# Altium PCB 3KW-139_V1.0PCB.PcbDoc (part 2 of 3)
Units mm, origin at the board's own origin, x right, y up, seen from the top; angles counter-clockwise.
Board outline 181.22 x 106.87 mm, 2 copper layers (Top Layer, Bottom Layer); 320 components, 0 nets, 807 pads, 870 vias.
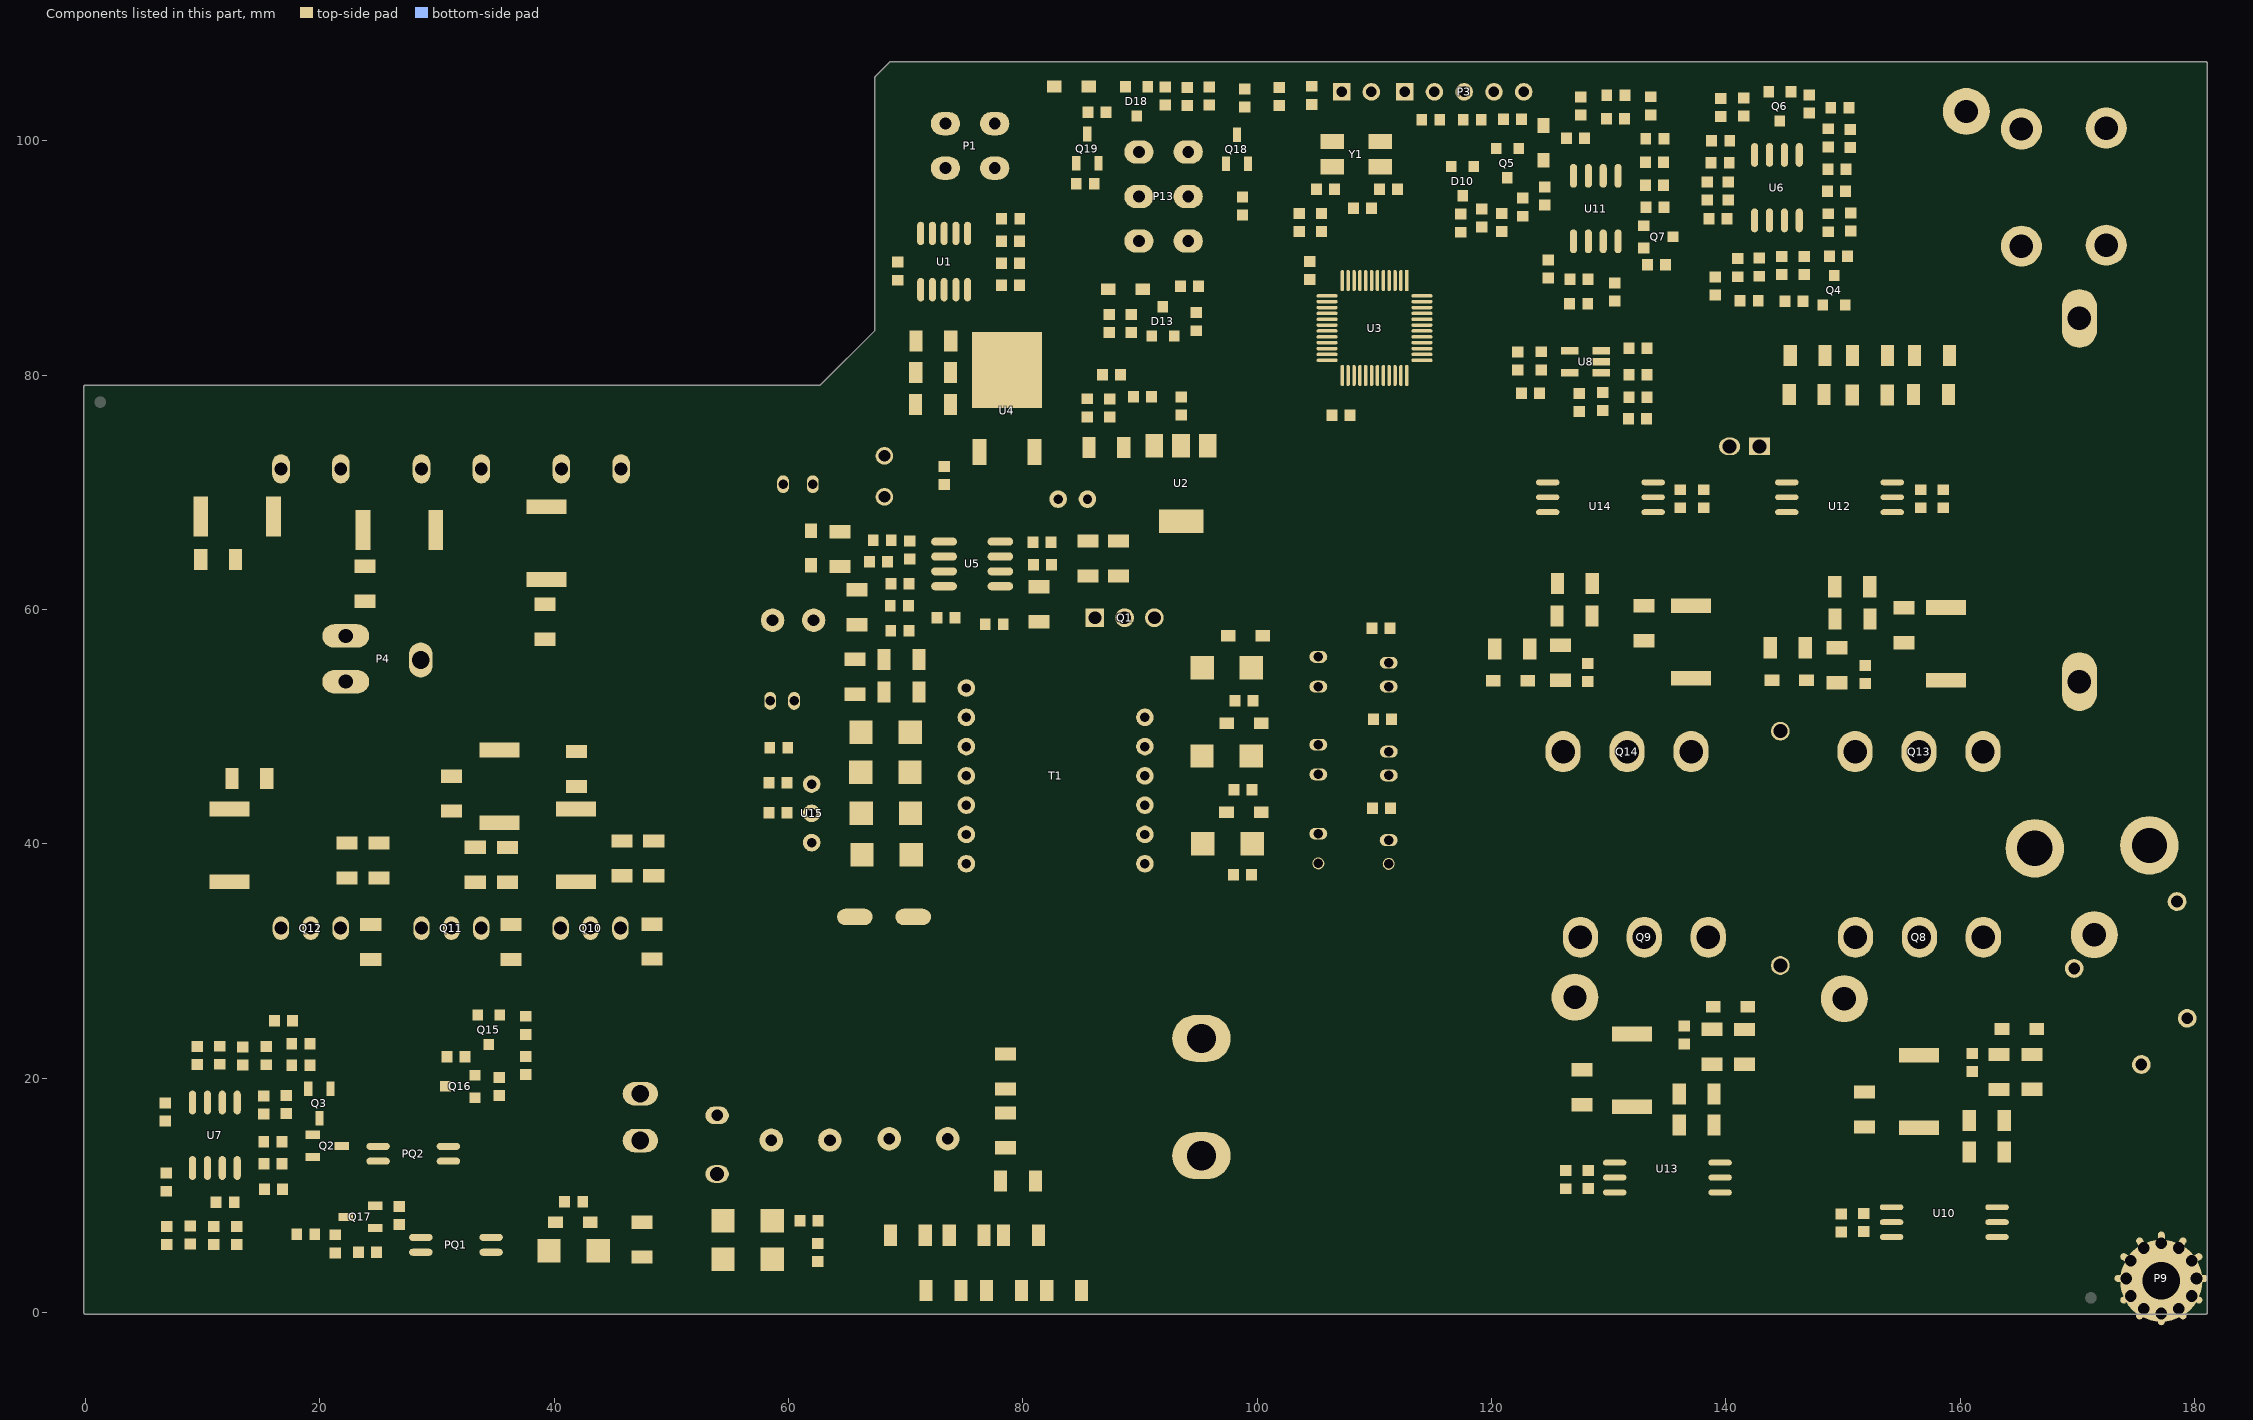
[diagram p2: the components of this part, seen from the top]

## Via types
v1: diameter 0.8, hole 0.5, Top Layer to Bottom Layer, 773 vias
v2: diameter 0.6, hole 0.4, Top Layer to Bottom Layer, 86 vias
v3: diameter 0.6, hole 0.3, Top Layer to Bottom Layer, 6 vias
v4: diameter 1.2, hole 0.8, Top Layer to Bottom Layer, 2 vias
v5: diameter 0.7/0.7 (per signal layer), hole 0.5, Top Layer to Bottom Layer, 1 vias
v6: diameter 0.7/0.8 (per signal layer), hole 0.5, Top Layer to Bottom Layer, 1 vias
v7: diameter 0.7, hole 0.4, Top Layer to Bottom Layer, 1 vias

## Nets (pads, with @x,y where several pads share a name; then routed paths per layer and width w, separated by ;. In a path a pad name is that pad's centre, name@x,y a point inside that pad or via, vN(x,y) a via of type N, cw(c..) or ccw(c..) an arc to the next point about the centre after c; other vN are vias at no path point) (continued)
copper on no net: | length 6732.2
  Top Layer w0.254: 72.294,87.297 72.36,87.363 72.36,88.686 74.073,90.399 75.806,90.399 77.069,91.662 77.069,92.361 77.946,93.238 78.204,93.238 ; 110.882,75.42 110.898,75.404 v2(110.898,74.05)
  Top Layer w0.3: v1@2.475,19.44 1.401,20.514 1.401,72.364 7.32,78.283 66.463,78.283 66.391,78.211 v1(66.303,78.211) ; v1@3.652,6.697 3.652,19.879 2.151,21.38 2.151,71.971 7.464,77.283 64.718,77.283 65.166,76.835 67.064,76.835 v1(67.32,77.092) 67.458,77.092 v1@67.44,77.073 ; 7.026,26.155 7.033,26.162 ; 15.282,10.54 15.597,10.855 15.597,11.152 16.482,12.037 16.482,12.384 16.797,12.699 ; 19.032,19.1 19.032,18.825 20.032,17.825 20.777,17.825 21.314,17.288 21.314,15.7 20.672,15.059 20.672,14.316 19.872,13.516 19.872,13.479 19.672,13.279 19.397,13.279 19.232,13.279 ; 61.938,63.781 61.938,63.906 63.01,64.978 66.07,64.978 66.927,64.121 66.927,64.096 ; 67.24,65.9 67.24,65.627 68.467,64.4 68.467,64.102 68.467,64.096 ; 68.738,58.204 68.738,58.229 69.049,58.54 69.049,58.778 69.921,59.651 69.921,59.996 70.236,60.311 ; v2@72.891,85.303 75.803,85.303 77.049,86.55 77.078,86.521 77.119,86.563 v2(83.857,86.563) ; 73.294,87.297 73.294,88.472 74.494,89.672 76.459,89.672 77.985,91.198 ; 74.294,87.297 74.294,88.411 74.804,88.922 77.567,88.922 ; 75.294,92.097 75.294,92.533 75.433,92.671 75.868,92.671 v2@76.164,92.967 ; 75.34,87.671 78.2,87.671 ; v2(76.083,92.244) 76.083,92.326 76.243,92.486 v2(76.243,93.065) ; 79.74,87.671 79.875,87.536 v2(81.962,87.536) ; 79.74,89.554 79.779,89.593 v2@80.42,89.593 ; 79.74,91.438 79.749,91.429 v2@81.587,91.429 ; 79.744,93.365 81.658,93.365 v2(81.665,93.372) ; 85.15,104.986 85.5,104.636 85.625,104.636 85.277,104.985 ; v2(85.466,88.737) 86.105,89.375 86.105,96.327 ; 85.497,79.693 85.553,79.693 ; 89.719,102.12 91.243,102.12 91.837,102.715 91.837,102.74 92.152,103.055 92.177,103.055 95.918,103.055 95.918,101.808 v2@95.912,101.802 ; 90.669,104.62 90.695,104.595 ; v2@90.726,103.641 90.726,104.563 90.695,104.595 ; 92.177,104.595 90.695,104.595 ; 93.237,87.576 93.38,87.718 93.38,88.23 94.381,89.231 95.861,89.231 v2(97.579,90.949) ; 95.923,104.59 95.918,104.595 95.922,104.599 v2(96.931,104.599) ; v2@97.637,91.007 98.754,92.124 98.754,93.675 98.729,93.675 98.414,93.36 ; v2@97.896,87.638 97.896,80.826 v2(97.898,80.826) ; v2(98.857,89.742) 98.857,89.743 98.87,89.73 98.87,84.047 100.144,82.774 105.971,82.774 ; v2(99.833,79.798) 101.308,81.274 105.971,81.274 ; v2@100.184,101.647 100.184,90.217 99.816,89.849 99.816,84.559 100.601,83.774 105.971,83.774 ; v2@100.327,78.189 101.9,79.761 107.271,79.761 ; v2@100.749,88.701 100.757,88.694 100.757,87.577 102.058,86.276 103.046,86.276 103.048,86.274 105.971,86.274 ; v2@100.757,85.432 101.415,84.774 105.971,84.774 ; v2(100.777,88.663) 100.777,89.863 101.043,90.128 101.043,100.849 101.911,101.717 101.911,103.025 ; v2(101.812,89.74) 101.839,89.767 101.839,100.306 104.648,103.115 ; v2@102.861,91.012 102.861,87.659 103.743,86.776 105.969,86.776 105.971,86.774 ; 103.602,92.271 102.936,92.271 102.619,92.588 102.619,99.63 104.671,101.682 113.928,101.682 114.049,101.803 ; 103.764,92.264 104.945,92.264 105.202,92.007 107.771,89.438 107.771,88.074 ; 103.764,93.804 103.852,93.717 105.507,93.717 ; 104.12,88.074 106.129,88.074 ; 104.416,103.137 104.648,103.369 ; 104.481,89.69 104.481,90.696 v2@104.492,90.707 ; 106.065,76.221 106.065,76.436 107.271,77.642 107.271,79.761 ; v2(106.129,88.919) 106.129,88.074 ; 106.395,97.784 106.609,97.57 ; 106.609,95.883 106.609,95.431 107.81,94.231 107.83,94.231 ; v1@107.164,62.723 107.782,63.342 107.782,73.355 107.92,73.492 107.92,76.38 108.121,76.581 ; v3(107.17,91.721) v3@107.17,91.786 ; 107.271,79.974 107.271,79.761 ; 107.271,88.074 106.129,88.074 ; 107.83,94.256 107.83,94.231 ; 108.211,94.231 107.83,94.231 ; v2(108.288,85.723) 108.307,85.742 v2(109.89,85.742) ; v2@108.292,85.89 108.271,85.911 108.271,88.074 108.271,90.685 v3@107.17,91.786 ; v2(108.488,97.875) v2(108.488,99.818) 104.855,99.818 104.445,99.408 104.445,96.507 104.729,96.223 104.754,96.223 105.069,95.908 105.069,95.883 105.192,95.761 105.192,94.032 105.507,93.717 ; v2(108.682,72.982) 108.74,73.039 108.74,75.226 109.271,75.757 109.271,79.974 ; 108.771,88.074 108.771,91.496 107.993,92.273 107.993,94.067 107.83,94.231 ; 108.791,97.784 110.495,97.784 ; 109.271,88.074 109.271,91.542 109.987,92.258 109.987,93.995 109.751,94.231 110.881,94.231 111.835,95.184 ; 109.771,74.473 109.771,79.974 ; 109.771,88.074 109.771,91.266 v2@113.758,95.253 ; v2@109.944,82.093 111.202,82.093 112.022,81.274 114.071,81.274 ; 110.271,79.974 110.271,76.031 110.882,75.42 ; v2@110.27,83.654 111.266,83.654 112.646,82.274 114.071,82.274 ; 110.495,99.937 111.013,99.937 112.299,98.651 112.299,96.196 111.984,95.881 111.984,95.856 ; v2@110.678,82.801 111.412,82.801 112.439,81.774 114.071,81.774 ; 110.771,79.974 110.771,76.918 111.798,75.891 111.798,70.37 v2(111.664,70.236) ; v2@110.988,84.705 112.919,82.774 114.071,82.774 ; 111.271,88.074 111.271,91.861 114.491,95.081 114.491,99.549 115.58,100.638 118.307,100.638 119.133,101.464 119.133,101.804 ; 111.771,79.974 111.771,78.007 112.794,76.984 120.076,76.984 ; 111.771,88.074 111.771,91.4 115.249,94.879 115.249,99.117 116.021,99.888 119.003,99.888 v2@119.443,100.328 ; 112.271,79.974 112.271,78.416 112.925,77.762 119.455,77.762 119.881,78.188 119.881,83.511 v2(122.486,86.116) v2@122.486,86.046 ; 114.071,83.274 115.305,83.274 118.133,80.446 v2(118.133,80.383) ; 114.071,83.774 115.773,83.774 119.03,80.516 v2@119.03,79.178 ; 114.071,84.774 115.889,84.774 119.065,81.598 v2(119.085,81.598) ; 114.071,85.774 117.803,85.774 ; 114.071,86.274 114.072,86.275 117.066,86.275 119.182,88.391 119.182,92.633 118.872,92.943 118.5,92.943 118.018,93.425 117.698,93.425 117.383,93.74 117.383,95.163 117.538,95.318 ; v2(114.268,88.889) 114.268,92.266 v2@114.974,92.972 ; v2(115.671,88.149) 115.671,90.637 117.383,92.348 117.383,92.2 ; 116.588,97.818 116.588,98.841 116.866,99.12 120.216,99.12 ; v2@116.618,87.36 116.618,90.091 v2(117.505,90.978) ; 117.849,85.775 122.656,90.582 122.656,93.568 121.114,93.568 120.878,93.803 121.054,93.979 121.054,96.52 121.066,96.52 121.366,96.82 121.366,96.845 ; 119.182,94.173 119.182,98.011 119.191,98.02 ; 120.077,76.985 121.609,76.985 ; 120.416,99.32 120.659,99.562 120.659,99.879 121.373,100.594 122.883,100.594 123.008,100.594 123.651,99.95 124.813,99.95 126.324,98.439 126.324,98.394 ; v2@120.878,90.937 120.878,92.263 ; 121.61,76.984 121.792,76.984 122.422,77.614 122.422,78.478 122.549,78.478 ; 122.161,80.507 122.234,80.433 122.549,80.119 ; 122.656,95.108 122.681,95.108 122.996,95.423 122.996,95.717 123.334,96.056 124.561,96.056 ; 122.883,100.718 122.883,101.483 122.568,101.798 122.568,101.823 122.568,101.848 122.883,102.163 122.908,102.163 124.491,103.745 127.604,103.745 ; 123.261,96.056 v2@123.261,96.552 ; 124.241,80.459 124.458,80.676 124.722,80.676 125.192,81.146 129.376,81.146 132.61,81.146 133.326,80.43 133.326,80.104 133.274,80.052 ; 124.241,81.999 124.338,82.096 ; 127.49,76.898 127.545,76.953 129.523,76.953 130.675,76.953 131.02,76.608 131.372,76.608 131.687,76.293 131.687,76.284 ; 131.337,78.494 131.734,78.098 ; 131.591,80.196 131.734,80.052 ; 134.709,94.355 134.709,94.228 134.718,94.219 ; 134.709,96.462 134.709,100.162 ; 138.76,99.985 138.794,100.019 ; 139.107,88.385 139.115,88.394 ; 139.115,88.385 139.115,88.394 ; 139.124,88.403 139.115,88.394 ; 139.564,103.612 139.597,103.646 ; 140.204,94.955 140.385,95.135 ; 140.326,100.011 140.334,100.019 ; 141.012,88.403 141.226,88.189 ; 141.486,102.072 141.52,102.106 ; 142.443,92.802 142.586,92.659 142.586,92.576 ; 142.766,86.369 142.866,86.469 ; 142.866,89.986 142.998,90.118 144.878,90.118 ; 143.729,98.799 143.729,97.207 145.159,95.777 148.595,95.777 148.668,95.705 ; 144.651,88.446 144.783,88.578 ; 144.745,89.986 144.878,90.118 ; 144.999,98.799 144.999,97.516 145.721,96.795 147.644,96.795 148.428,97.579 148.73,97.579 ; 145.059,90.3 144.878,90.118 ; 145.059,91.579 145.067,91.587 ; 145.067,92.517 145.126,92.576 ; 146.361,88.238 146.361,88.263 146.676,88.578 146.701,88.578 146.78,88.499 ; 146.701,90.118 144.878,90.118 ; 148.634,89.943 148.848,90.158 ; 148.73,99.474 148.745,99.489 148.796,99.438 ; 150.388,90.158 150.677,90.446 ; 105.507,93.717 105.532,93.717 105.75,93.498 106.349,93.498 106.974,92.873 106.974,91.981 v3@107.17,91.786 ; 111.835,95.184 111.984,95.333 111.984,95.856 ; 111.835,95.184 111.835,95.496 cw(c112.344,95.496) 111.984,95.856
  Top Layer w0.34: 109.771,71.59 109.771,74.473
  Top Layer w0.35: 12.911,5.8 12.911,3.342 13.601,2.652 55.953,2.652 56.594,3.293 56.594,5.805 58.619,7.831 ; 16.772,14.554 17.511,13.814 17.521,13.814 17.912,13.423 17.912,11.63 16.822,10.54 ; 18.07,12.084 20.731,12.084 21.897,13.251 21.897,14.229 21.937,14.19 24.984,14.19 ; 77.567,88.922 78.2,89.554 ; 88.769,104.62 88.769,105.309 89.249,105.789 94.073,105.789 94.052,105.768 ; 94.052,104.565 94.052,105.768 ; 99.043,105.561 98.939,105.664 98.835,105.768 ; 111.989,105.689 111.989,105.768 101.911,105.768 99.043,105.768 98.835,105.768 ; 112.411,105.636 112.595,105.453 ; 94.052,105.768 98.835,105.768
  Top Layer w0.381: 149.192,57.053 149.504,56.741
  Top Layer w0.4: 17.153,18.541 17.418,18.276 17.822,18.276 19.267,16.831 19.832,16.831 19.982,16.681 ; 17.407,18.745 17.407,20.742 ; 17.423,18.671 18.868,17.226 ; 17.619,21.082 17.619,21.107 ; 17.619,22.961 17.619,24.842 17.669,24.892 ; 17.891,25.146 17.873,25.128 17.873,24.765 20.058,24.765 20.932,23.891 20.932,19.1 ; 18.296,17.802 19.74,16.357 ; 19.397,15.179 19.422,15.179 19.806,15.564 19.806,16.175 19.832,16.175 19.982,16.325 19.982,16.6 19.982,16.681 ; 19.982,16.79 19.982,16.681 ; 30.861,21.844 30.861,23.368 31.623,24.13 34.925,24.13 35.376,24.581 35.376,25.396 ; 126.34,12.113 128.245,12.113 128.27,12.139 128.295,12.139 128.56,12.404 128.56,12.429 128.93,12.799 130.512,12.799
  Top Layer w0.5: v1(5.129,22.163) 5.129,24.258 7.026,26.155 ; 6.84,16.357 6.865,16.357 7.08,16.142 7.08,16.117 7.624,15.573 10.855,15.573 12.941,13.488 12.941,12.365 12.962,12.344 12.962,10.668 ; 6.891,10.362 6.942,10.312 6.942,7.365 6.967,7.391 8.974,7.391 8.999,7.391 9.214,7.606 9.214,7.631 8.977,7.867 8.977,9.525 10.422,10.969 10.422,12.344 ; 6.942,5.825 5.692,5.825 5.167,6.35 5.167,11.557 5.548,11.938 6.855,11.938 6.891,11.902 6.916,11.902 7.357,12.344 9.152,12.344 ; 7.033,26.162 14.478,26.162 15.508,25.132 15.914,25.132 16.129,24.917 16.129,24.892 ; v1(8.128,22.733) 8.154,22.707 9.508,22.707 ; v1@8.28,24.455 14.034,24.455 15.344,23.145 15.344,22.805 15.451,22.697 ; 8.974,5.851 8.974,2.657 10.804,0.827 70.677,0.827 71.755,1.905 ; 9.152,17.932 6.875,17.932 6.84,17.897 3.169,21.568 3.169,26.708 3.177,26.715 3.177,71.794 7.607,76.224 63.218,76.224 v1(63.739,75.704) ; 9.293,22.922 9.508,22.707 ; 9.533,21.167 11.463,21.167 11.488,21.192 11.692,20.989 11.692,17.932 ; 9.533,22.707 9.508,22.707 ; v1(10.414,19.685) 10.422,19.677 10.422,17.932 ; 10.955,5.825 10.955,2.656 11.834,1.777 67.623,1.777 68.707,2.861 68.707,6.604 ; 11.488,22.732 13.384,22.732 13.444,22.672 ; 11.692,12.344 11.692,10.715 11.136,10.16 11.136,9.454 11.168,9.423 11.136,9.391 11.136,7.547 10.955,7.365 10.98,7.34 12.911,7.34 ; 12.708,9.423 12.708,9.448 12.962,9.702 12.962,10.668 ; 12.911,5.8 14.527,5.8 15.282,6.555 15.282,9.021 ; v1@14.351,15.748 v1(14.393,15.79) 14.434,15.831 15.232,15.831 ; 15.017,14.819 15.232,14.604 ; 15.222,18.49 15.222,20.942 15.412,21.132 ; 15.232,14.579 15.232,14.604 ; 15.257,12.699 15.138,12.818 15.138,12.843 15.042,12.939 14.874,12.939 12.962,14.851 12.962,17.932 12.962,20.624 13.204,20.867 13.204,20.917 13.419,21.132 13.444,21.132 15.412,21.132 ; 15.451,21.157 15.425,21.132 15.412,21.132 ; v1@16.644,6.697 18.041,6.697 ; 16.772,14.554 16.772,14.579 ; 17.092,17.068 15.222,17.068 15.232,17.059 15.232,15.831 ; v1(19.122,5.052) 19.173,5.104 21.346,5.104 21.401,5.158 23.316,5.158 ; 19.132,19.2 19.032,19.1 19.032,20.98 19.159,21.107 ; 19.159,22.961 19.159,21.107 ; 19.177,21.089 19.159,21.107 ; 19.533,6.746 21.322,6.746 21.346,6.771 21.855,7.279 21.855,8.069 21.955,8.169 22.23,8.169 ; v1@21.436,16.253 25.737,16.253 26.936,15.054 26.936,13.371 26.485,12.92 24.984,12.92 24.984,10.59 ; 24.355,9.219 24.455,9.119 24.73,9.119 24.884,9.119 ; 24.733,7.334 26.479,7.334 ; 24.856,5.158 24.861,5.153 28.632,5.153 ; 26.775,7.518 26.8,7.518 26.825,7.518 27.04,7.303 27.04,7.278 27.844,6.473 27.855,6.473 27.905,6.423 28.632,6.423 ; 26.8,9.058 26.739,9.119 24.884,9.119 ; 30.754,19.304 30.754,21.737 30.861,21.844 ; 30.984,14.19 34.259,14.19 37.592,17.523 37.592,20.32 37.481,20.209 35.306,20.209 ; 30.985,12.919 30.984,12.92 35.961,12.92 40.268,17.227 40.268,20.786 44.56,25.077 56.333,25.077 62.06,30.804 68.029,30.804 70.606,33.381 70.606,33.724 70.653,33.772 ; 32.401,21.844 32.401,21.819 32.616,21.604 32.641,21.604 33.13,21.115 33.13,20.378 33.254,20.254 ; 33.254,18.354 33.315,18.415 35.052,18.415 35.306,18.669 ; 34.426,22.896 37.496,22.896 ; 34.632,5.153 39.456,5.153 39.572,5.27 38.939,5.27 ; 34.632,6.423 36.95,6.423 38.251,7.724 40.129,7.724 ; 35.376,25.396 35.483,25.289 37.601,25.289 ; 37.592,21.86 37.592,22.8 ; 37.601,23.749 37.592,23.739 37.592,22.896 ; 40.348,7.983 40.695,8.33 40.695,9.229 40.91,9.444 40.91,9.469 ; 42.45,9.469 42.45,9.444 42.665,9.229 42.665,8.198 42.916,7.947 ; 43.079,7.724 43.204,7.724 43.454,7.474 43.454,5.588 ; 43.772,5.27 44.304,4.738 ; 46.117,18.686 46.384,18.686 ; 47.001,18.686 47.364,18.686 ; 58.619,4.313 59.097,3.835 ; 58.652,59.092 58.652,59.213 ; 58.735,59.297 58.652,59.213 ; 59.543,70.695 59.543,70.58 59.305,70.342 59.191,70.342 58.652,69.803 58.652,59.213 ; 59.877,45.254 61.843,45.254 61.99,45.107 ; 59.896,42.648 59.936,42.607 61.99,42.607 62.004,42.62 66.223,42.62 ; 61.99,40.107 59.808,40.107 58.331,41.585 58.331,43.133 58.357,43.16 58.357,45.231 58.357,48.143 58.409,48.195 58.409,52.162 58.452,52.206 58.452,59.014 58.652,59.213 ; 62.503,4.357 63.624,4.357 64.745,5.478 64.745,10.8 66.323,12.379 71.945,12.379 73.608,14.042 73.608,14.838 ; 62.503,5.897 62.542,5.936 ; 62.63,5.897 62.662,5.929 ; 63.542,14.679 63.542,14.721 64.232,14.721 ; 64.232,66.814 65.247,66.814 65.606,67.172 74.967,67.172 75.718,66.422 75.718,65.079 76.27,64.527 78.089,64.527 ; 66.154,33.357 65.74,33.772 ; 66.282,34.186 65.867,33.772 65.74,33.772 ; 66.743,38.055 67.009,38.321 ; 67.24,65.9 67.266,65.925 ; 68.193,73.116 68.531,73.116 69.436,72.211 73.289,72.211 ; 68.467,64.096 70.194,64.096 70.287,64.188 ; 68.467,64.102 68.682,64.317 ; 68.696,60.311 68.696,61.224 68.696,62.14 68.747,62.191 ; 68.78,65.9 70.311,65.9 70.372,65.839 72.444,65.839 72.485,65.797 72.874,65.797 ; 70.05,34.179 70.075,34.204 ; 70.151,58.331 70.151,58.306 70.493,57.964 71.727,57.964 72.77,56.92 90.117,56.92 91.232,58.036 91.232,59.305 91.232,62.027 90.39,62.87 88.174,62.87 85.558,62.87 ; 70.287,62.191 70.287,64.188 ; 70.312,60.235 70.236,60.311 70.346,60.421 71.141,60.421 71.452,60.732 71.452,62.647 72.024,63.219 73.251,63.219 73.289,63.257 ; 71.294,92.097 71.294,92.651 70.226,93.719 70.226,95.449 72.449,97.673 73.406,97.673 ; v1@71.733,94.486 72.294,93.925 72.294,92.097 ; 72.684,59.193 72.684,59.32 72.684,60.51 ; 72.781,65.89 72.874,65.797 ; 73.289,61.987 72.776,61.987 72.684,61.895 72.684,60.51 ; 73.289,64.527 70.626,64.527 70.397,64.299 ; 73.289,65.797 72.874,65.797 ; 73.294,92.097 73.294,94.598 74.068,95.372 75.305,95.372 77.606,97.673 ; 73.406,101.473 73.406,101.629 74.179,102.402 74.179,102.425 75.319,103.564 79.292,103.564 80.086,102.769 80.086,96.019 79.316,95.249 77.362,95.249 76.34,94.228 74.906,94.228 74.294,93.616 74.294,92.097 ; 74.439,59.433 74.224,59.218 74.224,59.193 74.416,59.002 76.584,59.002 76.799,58.787 76.799,58.762 ; 74.956,37.965 75.184,37.965 75.184,38.307 ; 75.294,87.297 75.294,87.625 75.34,87.671 ; 75.975,61.987 78.089,61.987 ; 77.985,91.198 78.2,91.413 78.2,91.438 ; 78.089,63.257 79.46,63.257 80.593,62.125 81.081,62.125 81.396,61.81 ; 78.089,65.797 80.812,65.797 80.863,65.747 80.863,63.867 80.913,63.816 ; 78.339,58.762 78.407,58.83 81.396,58.83 81.731,58.83 81.899,58.997 85.844,58.997 86.152,59.305 ; 82.403,65.747 82.506,65.85 83.163,65.85 ; 82.453,63.816 82.453,63.791 82.668,63.576 82.693,63.576 83.479,62.791 83.479,61.218 82.771,60.51 72.684,60.51 ; 82.894,104.418 82.675,104.636 82.675,95.324 84.377,93.622 v2(84.377,91.425) ; 83.021,69.423 83.021,65.992 83.163,65.85 ; 84.559,98.079 84.565,98.072 84.565,96.327 ; 85.509,100.579 85.509,102.41 85.553,102.454 ; 85.625,104.636 v2(87.018,104.636) ; 86.459,98.079 87.43,99.05 89.916,99.05 ; 87.093,102.454 88.769,104.13 88.769,104.62 ; 87.301,87.329 87.291,87.32 86.497,87.32 86.023,86.845 86.023,84.015 86.398,83.64 87.389,83.64 ; 87.389,85.18 89.231,85.18 89.241,85.19 89.266,85.19 89.481,85.405 89.481,85.43 89.887,85.836 91.965,85.836 92.11,85.691 v2(93.529,85.691) 93.88,85.34 94.821,85.34 94.827,85.334 ; 88.174,65.85 85.558,65.85 83.163,65.85 ; 89.241,83.65 89.456,83.435 89.675,83.435 89.774,83.336 91.015,83.336 ; 90.251,87.329 90.251,87.493 94.162,91.404 94.116,91.45 ; v2(90.358,65.113) 104.887,65.113 106.932,67.159 v2@106.932,74.122 ; 92.915,83.336 93.315,83.737 96.155,83.737 ; 93.746,78.11 95.026,78.11 95.806,77.329 95.806,73.993 ; 93.746,78.364 93.531,78.149 93.531,79.095 92.573,80.054 88.343,80.054 88.343,78.879 ; 95.004,87.606 95.004,87.581 95.219,87.366 95.244,87.366 96.155,86.455 96.155,83.737 ; 97.334,98.031 97.334,96.527 98.468,95.392 ; 97.392,42.699 99.572,40.032 97.98,38.44 97.98,37.365 ; 97.396,50.294 97.642,50.048 97.642,49.354 99.496,47.5 98.04,46.044 98.04,44.63 ; 97.545,57.762 97.744,57.563 97.744,56.804 99.504,55.044 98.107,53.647 98.107,52.199 ; 98.284,100.531 98.284,102.222 98.713,102.652 98.713,102.677 98.928,102.892 98.953,102.892 ; 98.953,104.432 99.043,104.521 99.043,105.561 ; v2(99.086,96.875) 99.086,96.902 99.184,97.001 99.184,97.981 99.234,98.031 ; 99.58,44.63 101.526,44.63 102.87,45.974 105.18,45.974 105.228,45.925 105.305,45.849 111.239,45.849 ; v2(100.061,76.137) 96.155,80.044 96.155,83.737 ; 100.342,42.699 102.262,42.699 103.886,44.323 110.998,44.323 111.391,43.93 111.391,43.055 111.391,40.491 111.228,40.328 111.174,40.273 110.758,40.273 109.535,39.05 109.535,3.495 110.048,2.982 158.271,2.982 159.093,3.804 159.093,11.692 160.782,13.381 160.782,13.716 ; 100.495,57.762 102.339,57.762 104.267,59.69 110.466,59.69 111.331,58.825 111.331,58.42 ; 101.911,104.565 101.911,105.565 101.918,105.572 ; 104.889,104.669 106.719,104.669 107.206,104.182 107.499,103.889 ; 105.228,40.871 105.814,40.871 107.061,39.624 107.061,2.159 108.204,1.016 164.338,1.016 v1@165.862,2.54 ; 106.609,95.883 106.609,97.57 ; v1@107.164,62.723 110.759,62.723 115.316,58.166 115.316,51.435 116.84,49.911 116.84,41.656 116.84,7.197 117.56,6.477 145.793,6.477 v1@147.606,4.664 ; v1@107.442,57.785 v1(107.505,57.721) 107.569,57.658 109.093,57.658 ; v2@109.05,70.127 109.05,65.775 116.266,58.56 116.266,52.065 117.856,50.475 117.856,39.719 117.856,8.308 118.737,7.427 147.447,7.427 147.984,6.89 149.835,6.89 ; 109.093,45.974 109.093,49.799 109.918,50.624 ; 109.22,42.418 109.617,42.815 ; 109.601,58.166 109.093,57.658 ; 109.771,71.59 110.284,71.076 110.284,66.119 117.216,59.187 117.216,52.657 118.999,50.873 118.999,11.413 119.839,10.573 126.34,10.573 ; 109.851,43.055 109.851,43.03 109.636,42.815 109.617,42.815 ; 110.444,95.856 110.444,97.733 110.495,97.784 ; 111.163,45.925 111.239,45.849 ; 111.228,53.429 109.766,53.429 109.093,54.102 109.093,57.658 ; 111.228,55.461 111.331,55.564 111.331,58.42 ; 111.356,58.395 111.331,58.42 ; 111.989,105.689 112.042,105.636 112.411,105.636 112.595,105.636 127.499,105.636 ; 112.595,105.453 112.595,104.186 114.031,102.75 114.031,101.821 114.049,101.803 ; v2@113.267,76.11 121.255,76.11 ; v2(113.324,74.047) 115.297,74.047 115.309,74.035 136.994,74.035 138.997,72.032 157.811,72.032 158.547,71.297 158.547,70.228 158.576,70.257 ; v1(113.538,50.419) 114.935,49.022 114.935,6.096 115.824,5.207 v1(141.351,5.207) ; v2(113.984,75.101) 120.831,75.101 v2(120.841,75.11) ; v2(115.024,72.952) 136.027,72.952 138.085,70.893 138.085,70.243 138.1,70.228 ; 115.135,104.186 115.135,103.915 115.589,103.461 115.589,101.803 117.593,101.804 ; 117.675,104.186 119.11,102.751 119.11,101.826 119.133,101.804 119.152,101.823 121.028,101.823 ; 118.488,97.82 118.688,98.02 119.191,98.02 122.236,98.02 ; 120.216,99.12 120.416,99.32 ; v2@120.858,78.243 120.858,82.934 121.741,83.817 127.247,83.817 128.239,84.809 128.239,86.085 128.217,86.107 ; 121.256,76.11 124.286,76.11 126.437,78.261 127.313,78.261 127.49,78.438 ; 122.234,81.973 122.26,81.999 ; 122.316,99.345 122.316,98.1 122.236,98.02 ; 122.329,82.068 122.26,81.999 ; 122.422,78.478 122.422,80.119 ; v1@122.622,63.299 122.622,60.808 123.971,59.459 125.603,59.459 ; 122.945,68.309 123.219,68.309 123.223,68.313 124.801,68.313 125.592,68.313 125.628,68.277 125.628,62.227 ; 122.953,70.853 124.801,70.853 127.036,70.853 127.989,69.9 v1@127.989,66.245 ; 123.258,56.639 123.258,56.787 123.258,58.505 121.099,60.663 121.099,68.712 121.97,69.582 124.05,69.582 124.051,69.583 124.801,69.583 ; 124.089,78.478 124.089,79.285 124.089,80.306 124.241,80.459 ; 124.241,81.999 122.26,81.999 ; 124.338,82.096 126.676,82.096 129.376,82.096 131.528,82.096 ; 124.434,101.306 124.434,101.431 124.684,101.681 126.228,101.681 126.531,101.984 126.531,101.978 ; 124.561,96.056 124.561,98.228 124.352,98.02 122.236,98.02 ; 124.833,88.295 124.932,88.196 126.699,88.196 126.699,88.2 126.736,88.237 126.736,89.148 127.161,89.573 129.132,89.573 129.536,89.977 129.536,91.425 v3@129.536,93.258 ; 125.102,94.568 126.182,94.568 126.996,95.382 126.996,97.013 126.996,97.725 126.447,98.274 ; 126.415,100.233 126.531,100.348 126.531,101.978 ; 126.676,80.196 126.676,78.515 127.087,78.515 ; 126.996,91.425 126.996,93.814 128.266,95.084 128.266,97.013 128.266,100.233 ; 127.545,76.953 127.583,76.991 ; 127.604,102.205 127.579,102.205 127.351,101.978 126.531,101.978 ; 127.604,103.745 127.604,105.532 127.499,105.636 ; 127.955,100.233 127.955,100.258 128.17,100.473 128.377,100.473 129.568,101.664 129.593,101.664 129.808,101.879 129.808,101.904 ; 128.219,55.411 128.263,55.455 129.242,55.455 v1(129.286,55.499) ; 128.239,88.2 128.239,88.225 128.454,88.44 128.95,88.44 v2@129.027,88.518 ; 128.266,91.425 128.266,93.517 129.095,94.346 131.801,94.346 ; 128.27,10.599 128.295,10.599 128.51,10.384 ; 128.432,86.347 128.217,86.132 128.217,86.107 ; 128.51,10.359 128.51,10.384 ; 129.376,80.196 131.591,80.196 ; 129.479,76.972 129.504,76.972 129.523,76.953 ; v2@129.52,95.476 129.52,96.996 129.536,97.013 129.536,98.799 131.348,100.61 131.348,101.904 ; 129.719,76.732 129.719,76.757 ; 129.721,101.817 129.808,101.904 ; 129.843,103.89 129.843,101.939 129.808,101.904 ; 129.854,78.494 131.337,78.494 ; 130.516,86.332 131.178,86.332 131.819,86.974 131.819,94.328 131.801,94.346 ; 130.608,87.965 130.516,87.872 ; 130.806,91.425 130.827,91.404 130.827,90.615 130.849,90.593 130.849,89.71 130.516,89.377 130.516,87.872 ; 130.806,97.013 130.806,97.754 130.861,97.809 130.861,97.833 131.184,98.156 133.143,98.156 133.143,102.283 131.776,103.65 131.598,103.65 131.383,103.865 131.383,103.89 ; 131.734,78.098 131.734,80.052 ; 131.743,82.313 131.834,82.403 v2@131.834,83.431 ; v1@132.231,70.612 132.472,70.853 133.801,70.853 135.515,70.853 135.853,70.515 135.853,70.443 136.068,70.228 136.093,70.228 ; v2(132.862,90.2) 132.881,90.181 132.881,89.873 133.303,89.451 133.303,89.426 133.283,89.407 133.283,82.313 133.283,82.288 134.439,81.132 v2(134.439,78.195) 134.412,78.195 134.315,78.098 133.274,78.098 ; 132.994,92.754 133.907,92.754 134.676,93.523 134.676,94.8 134.709,94.833 ; 133.153,96.2 133.153,94.371 133.178,94.346 131.801,94.346 ; 133.227,76.284 134.809,76.284 135.947,77.422 ; 133.485,103.759 133.485,105.569 ; 133.801,68.313 135.693,68.313 136.068,68.688 136.093,68.688 138.1,68.688 ; 134.693,96.2 134.693,100.146 134.709,100.162 ; 134.709,96.462 134.709,94.833 ; 134.718,94.346 134.709,94.355 134.709,94.833 ; 134.776,87.711 134.776,82.882 135.947,81.711 135.947,77.422 ; 134.791,87.711 134.791,89.375 134.843,89.426 134.843,91.154 135.269,91.579 135.269,91.604 135.469,91.804 135.494,91.804 ; v2(136.885,83.466) 136.897,83.477 136.897,95.593 136.897,95.605 137.632,96.341 138.286,96.341 138.427,96.481 ; 137.032,60.322 137.033,60.324 ; 138.27,96.638 138.427,96.481 ; 138.414,97.708 138.414,99.051 ; 138.414,98.857 138.414,100.2 ; 138.427,94.941 140.204,94.941 ; 138.571,93.371 138.571,91.543 137.847,90.819 137.847,85.28 144.384,78.743 145.091,78.743 145.406,78.428 145.406,78.343 ; 138.684,15.337 138.669,15.352 ; 138.75,98.151 138.75,98.147 138.535,97.932 ccw(c138.535,97.824) 138.427,97.824 138.427,96.481 ; 138.76,98.037 138.76,99.985 ; 138.794,100.019 138.794,100.044 138.579,100.259 138.554,100.259 138.198,100.615 138.198,103.121 138.667,103.589 139.541,103.589 139.564,103.612 ; 138.811,21.206 138.828,21.19 ; 138.997,16.002 138.997,15.667 138.682,15.352 138.669,15.352 ; 138.997,18.669 140.716,18.669 141.351,18.034 v1(141.351,13.589) 141.351,13.335 140.815,12.799 139.512,12.799 ; 139.115,86.845 139.115,85.636 143.055,81.696 145.491,81.696 ; 139.115,88.394 139.115,90.275 140.205,91.365 143.424,91.365 143.729,91.671 143.729,93.211 ; 139.253,88.532 139.124,88.403 141.012,88.403 ; 139.512,11.529 141.831,11.529 142.875,12.573 142.875,20.193 142.23,20.838 142.23,20.875 141.915,21.19 141.58,21.19 ; 139.564,102.072 141.486,102.072 ; 139.597,103.646 141.52,103.646 ; 140.204,94.955 140.204,94.941 ; 140.204,96.495 140.204,97.916 cw(c140.326,97.916) 140.326,98.037 140.326,100.011 ; 140.323,73.922 140.131,74.113 139.255,74.113 135.947,77.422 ; 141.012,89.943 148.634,89.943 ; 141.226,86.369 141.226,88.189 ; 141.52,102.106 141.545,102.106 141.76,101.891 141.87,101.891 143.729,100.032 143.729,98.799 ; v2@141.852,100.343 142.438,99.757 142.438,98.82 142.459,98.799 142.463,98.796 142.463,96.456 143.991,94.927 147.5,94.927 148.432,93.995 148.506,93.995 148.721,93.78 150.164,93.78 150.166,93.843 150.208,95.705 158.281,95.705 159.589,94.398 159.589,92.548 ; 142.459,93.211 ccw(c142.3,93.211) 142.3,93.371 140.111,93.371 140.111,94.848 cw(c140.204,94.848) 140.204,94.941 ; 142.866,86.469 142.866,88.446 144.651,88.446 ; v1@142.943,66.283 142.9,66.24 142.9,63.959 147.504,59.355 149.151,59.355 149.327,59.179 ; v2@143.108,102.935 143.52,103.348 143.52,104.049 143.663,104.191 ; 143.418,70.851 143.42,70.853 145.203,70.853 147.21,70.853 147.736,70.327 v1(147.736,66.379) ; 143.464,68.313 145.203,68.313 145.203,63.758 147.006,61.955 148.974,61.955 149.301,62.283 149.301,61.948 ; 143.692,104.342 142.398,105.636 133.485,105.636 127.499,105.636 ; v1(144.399,4.572) 143.764,3.937 114.77,3.937 113.919,4.788 113.919,44.831 112.901,45.849 111.239,45.849 ; v1(144.448,10.336) 144.371,10.259 139.512,10.259 138.077,10.259 137.414,10.922 137.414,14.224 138.542,15.352 138.669,15.352 ; 144.613,101.691 146.406,101.691 147.094,102.379 147.119,102.379 147.304,102.563 148.742,102.563 148.957,102.778 148.957,102.803 ; 144.926,86.44 144.951,86.415 145.054,86.313 ; 145.059,90.3 145.059,91.579 ; 145.067,91.587 145.067,92.517 ; 145.203,69.583 142.946,69.583 141.517,68.155 141.517,63.463 146.778,58.202 146.778,56.741 ; 145.563,104.191 145.654,104.283 ; 145.763,103.969 146.923,103.969 147.053,104.099 v2(148.343,104.099) ; 146.269,93.211 146.269,93.138 146.32,93.087 v2(147.342,93.087) 148.084,92.345 148.617,92.345 148.721,92.24 ; 146.269,98.799 146.269,99.508 147.791,101.029 148.745,101.029 150.575,101.029 150.627,100.978 ; 146.594,86.313 146.594,88.471 146.701,88.578 ; 146.78,88.499 149.235,88.499 ; v1@147.489,10.13 145.929,8.57 133.416,8.57 131.727,10.259 130.512,10.259 128.635,10.259 128.51,10.384 ; v1(147.563,4.65) 151.004,4.65 151.815,5.462 151.815,6.916 ; v2@147.866,87.835 147.866,88.492 ; 148.085,86.224 148.285,86.024 148.285,85.999 ; 148.73,97.579 148.73,99.474 ; 148.796,99.438 150.627,99.438 ; 149.835,8.43 151.765,8.43 151.79,8.456 151.815,8.456 152.03,8.671 152.03,8.696 152.324,8.989 154.148,8.989 ; 150.185,85.999 151.057,85.999 ; 150.27,97.579 158.779,97.579 v1@159.4,98.2 ; 150.388,90.158 150.388,90.133 150.717,89.804 150.717,89.24 v3(150.736,89.221) ; 150.412,26.499 150.114,26.797 150.114,30.558 151.054,31.498 151.054,32.029 ; 150.497,101.384 150.497,102.803 ; 150.677,90.446 150.677,92.291 ; 150.719,89.837 150.719,92.51 ; 151.116,19.134 151.526,19.134 151.776,18.884 151.841,18.819 ; 151.165,86.004 151.878,86.717 v2@151.878,93.035 ; 151.79,6.916 151.815,6.916 ; 151.841,15.839 151.91,15.77 ; v1@152.548,70.541 152.859,70.853 154.203,70.853 155.992,70.853 156.376,70.468 156.376,70.443 156.591,70.228 156.616,70.228 ; 154.148,6.449 152.282,6.449 151.815,6.916 ; 154.203,68.313 156.216,68.313 156.591,68.688 156.616,68.688 158.547,68.688 ; 155.068,51.265 155.068,51.247 155.952,50.364 ; 156.21,47.6 156.489,47.879 156.489,48.357 ; 159.08,81.671 159.08,82.006 159.395,82.321 159.496,82.321 ; 160.782,19.477 160.123,18.819 ; 160.782,20.366 160.95,20.533 160.963,20.533 ; 160.82,20.39 160.963,20.533 ; 161.011,20.581 160.963,20.533 ; 161.133,23.79 161.133,22.662 161.133,22.243 161.011,22.121 161.944,22.121 ; 161.93,23.615 161.944,23.601 161.944,22.676 161.944,22.121 ; 163.148,7.719 166.969,7.719 167.942,8.692 167.942,17.67 166.87,18.741 166.456,18.741 166.141,19.056 166.125,19.039 ; 163.148,8.989 165.648,8.989 165.978,9.319 165.978,15.52 165.115,16.383 163.762,16.383 ; 163.322,22.019 163.22,22.121 161.944,22.121 ; 163.762,13.716 163.762,12.02 163.255,11.513 162.118,11.513 160.966,10.361 160.966,7.069 161.586,6.449 162.893,6.449 ; 164.955,6.449 163.148,6.449 162.893,6.449 ; 166.141,22.036 166.563,22.457 ; 166.522,24.204 166.397,24.204 166.147,23.954 166.369,23.954 166.563,23.76 ; 176.022,21.162 180.086,17.098 180.086,5.715 179.025,4.654 ; 12.962,10.668 13.089,10.54 15.282,10.54 15.282,9.021 ; 15.232,14.604 15.232,15.831 ; 15.282,9.021 17.908,9.021 19.548,10.66 24.914,10.66 24.984,10.59 ; 24.884,9.119 24.984,9.219 24.984,10.59 ; 37.496,22.896 37.592,22.896 ; 37.496,22.896 37.592,22.8 ; 37.592,22.8 37.592,22.896 ; 37.592,22.896 38.833,22.896 42.912,26.976 54.536,26.976 61.332,33.772 65.674,33.772 65.74,33.772 ; 70.287,64.188 70.397,64.299 ; 70.287,64.188 70.287,64.213 70.372,64.299 70.397,64.299 ; 87.443,77.973 88.464,77.973 ; 87.443,77.973 87.62,78.151 ; 87.443,77.973 87.418,77.973 87.595,78.151 87.62,78.151 ; 87.62,78.151 88.343,78.151 ; 87.62,78.151 87.658,78.188 87.658,78.213 88.323,78.879 88.343,78.879 ; 88.343,78.151 88.343,78.879 ; 88.343,78.151 88.343,78.094 88.464,77.973 ; 88.343,78.151 89.448,78.151 ; 88.343,78.879 88.831,78.391 89.233,78.391 89.448,78.176 89.448,78.151 ; 88.464,77.973 89.271,77.973 89.448,78.151 ; 109.617,42.815 109.611,42.815 108.585,41.789 108.585,41.783 v1(108.331,41.529) 108.331,40.767 108.331,2.921 109.22,2.032 161.544,2.032 162.893,3.381 162.893,6.449 ; 128.217,86.107 129.638,87.399 130.516,87.872 ; 160.123,18.819 160.758,18.819 160.782,18.795 160.782,18.16 160.123,18.819
  Top Layer w0.51: 100.346,50.294 104.777,50.294 106.553,52.07 110.998,52.07 111.458,51.61 111.458,50.624 111.458,48.1 111.239,47.881 ; 123.09,53.922 123.141,53.871 125.984,53.871 ; 125.476,27.092 125.517,27.051 126.553,26.015 127.508,25.06 ; 125.882,53.972 125.984,53.871 ; v1@126.111,26.543 126.746,26.543 127.127,26.924 127.584,27.381 127.584,32.029 127.584,37.668 131.572,41.656 131.572,47.879 131.836,48.143 ; 126.111,53.744 125.984,53.871 ; 128.219,53.871 125.984,53.871 ; 132.78,57.342 133.02,57.342 ; 135.636,20.701 135.763,20.828
  Top Layer w0.8: 12.319,36.778 13.26,36.778 16.693,33.345 16.693,32.809 ; 22.327,40.068 v1(23.698,40.068) 25.07,40.068 ; 33.274,39.713 33.282,39.704 33.406,39.828 v1(34.787,39.828) 35.919,39.828 36.043,39.704 v1@36.043,40.259 ; 33.476,25.396 33.476,30.094 ; 35.331,41.81 35.818,41.81 36.043,41.585 v1@36.043,40.259 ; 40.91,9.469 40.91,10.704 41.848,11.642 43.484,11.642 44.438,12.596 44.438,16.741 46.384,18.686 ; 41.885,36.781 41.783,36.883 41.783,40.256 ; 41.885,42.981 41.91,43.006 41.91,44.645 ; 43.454,5.588 43.772,5.27 ; 44.304,4.738 47.519,4.738 ; 45.664,32.809 45.664,32.874 45.941,33.151 48.362,33.151 48.362,37.125 48.513,37.276 45.795,37.276 ; 48.513,40.256 45.795,40.256 41.783,40.256 ; 58.619,4.313 58.663,4.357 62.399,4.357 ; 59.949,48.195 62.313,48.195 ; 61.002,7.832 58.62,7.832 58.619,7.831 58.619,14.645 58.542,14.721 58.542,16.651 60.342,18.45 69.916,18.45 71.38,19.913 71.38,26.77 79.779,35.169 79.779,44.213 78.185,45.807 75.184,45.807 ; 61.938,63.781 61.938,60.368 61.922,60.353 61.922,59.322 62.152,59.092 ; 62.038,66.506 61.938,66.606 61.938,66.731 ; 62.083,70.89 62.083,70.695 62.083,67.425 62.038,67.379 ; 62.255,58.971 62.313,58.913 62.313,48.195 ; 62.542,5.936 62.542,7.832 62.542,13.678 63.542,14.679 ; 62.721,66.731 62.686,66.731 ; 63.897,63.504 64.062,63.669 64.397,63.669 64.732,63.669 64.904,63.497 64.904,62.312 65.526,61.691 65.861,61.691 ; 64.397,66.649 64.232,66.814 64.15,66.731 62.686,66.731 ; 65.669,52.773 67.993,52.773 68.158,52.938 68.158,52.959 ; v1@65.669,55.753 v1@65.927,55.753 ; v1@66.037,49.676 v1@66.195,49.518 ; v1@66.092,55.918 v1@65.927,55.753 ; 66.177,46.104 65.816,46.465 64.043,46.465 62.313,48.195 ; 66.282,34.186 66.282,39.066 ; 68.158,55.753 v1@65.927,55.753 ; 68.193,69.616 69.249,70.671 73.289,70.671 79.6,70.671 80.943,72.014 80.943,73.38 81.016,73.454 81.016,73.631 81.216,73.831 85.645,73.831 ; 69.35,88.105 69.415,88.04 69.878,88.04 ; 70.377,46.104 70.725,46.452 71.424,46.452 73.279,48.307 75.184,48.307 ; 70.395,49.518 72.075,49.518 73.364,50.807 75.184,50.807 ; 70.423,42.62 70.753,42.62 71.259,43.126 75.003,43.126 75.184,43.307 ; 70.482,39.066 70.703,39.287 71.318,39.287 72.838,40.807 75.184,40.807 ; 70.842,75.721 70.857,75.589 ; 70.857,87.061 70.882,87.035 71.144,87.297 ; 71.278,34.287 74.956,37.965 ; 73.837,77.51 73.837,78.756 ; 73.845,80.215 78.421,80.215 ; 76.093,74.01 76.293,73.81 76.293,73.45 ; 78.098,11.226 78.098,13.898 78.263,14.063 78.542,14.063 ; 78.542,17.043 78.542,19.093 ; 81.651,73.454 83.61,73.454 ; 83.661,73.505 83.61,73.454 ; v1@84.298,76.376 85.027,76.376 85.032,76.382 85.422,76.382 85.487,76.447 ; 85.487,77.987 85.487,79.981 ; v2(85.5,80.804) 85.5,80.816 85.487,80.829 85.487,79.981 ; 85.595,73.67 85.645,73.619 ; 86.803,80.054 85.559,80.054 85.487,79.981 ; 87.418,76.433 85.525,76.433 ; 90.424,40.807 90.718,40.513 94.892,40.513 95.372,40.032 ; 90.424,45.807 93.603,45.807 95.296,47.5 ; 90.424,50.807 93.86,50.807 95.304,52.251 95.304,55.044 ; 90.988,78.151 90.988,74.214 91.209,73.993 91.047,73.831 ; 93.506,71.159 93.523,71.159 93.852,71.159 ; 93.506,72.291 93.506,72.427 ; 93.506,73.993 93.531,74.018 93.531,76.609 ; 93.523,67.553 94.425,67.553 97.525,67.553 99.96,69.988 v2@99.96,76.102 ; 97.392,42.699 97.517,42.699 97.617,42.599 ; 99.496,47.5 101.729,47.5 102.694,48.465 105.228,48.465 ; 99.504,55.044 99.595,55.135 101.236,55.135 102.059,55.958 105.228,55.958 ; 99.52,37.365 102.77,37.365 103.759,38.354 105.205,38.354 105.228,38.331 ; 99.572,40.032 102.135,40.032 102.974,40.871 105.228,40.871 ; 99.647,52.199 101.856,52.199 103.075,53.418 105.228,53.418 ; 111.194,38.331 111.228,38.296 ; 111.218,53.418 111.228,53.429 ; 120.14,53.922 120.14,56.502 120.278,56.639 ; 123.258,56.787 123.423,56.952 125.882,56.952 ; 126.111,47.879 126.111,53.744 ; 127.508,20.701 135.636,20.701 ; 127.7,17.653 131.425,17.653 ; 128.263,55.455 128.609,55.801 128.609,59.432 128.583,59.459 128.608,59.484 128.608,62.227 ; 131.836,48.143 131.836,56.398 132.78,57.342 ; 133.02,60.322 137.032,60.322 ; 136.017,19.283 136.017,22.476 136.449,22.908 ; 136.068,16.025 136.068,18.76 ; 136.449,24.448 138.557,24.448 ; 138.828,21.19 141.58,21.19 ; 143.798,56.741 143.798,54.075 143.898,53.975 143.94,53.975 ; 146.778,56.741 149.504,56.741 ; 146.89,53.975 147.015,53.975 147.229,53.761 149.504,53.761 149.588,53.677 151.892,53.677 151.892,49.588 151.028,48.724 151.028,47.879 ; 148.386,78.343 148.412,78.318 150.8,78.318 ; 148.471,81.696 150.791,81.696 150.817,81.671 ; 151.892,48.572 151.892,52.661 ; 151.892,55.217 151.92,55.245 ; 151.91,15.77 156.489,15.77 ; 152.281,61.948 152.307,61.923 152.307,59.179 152.307,55.632 151.92,55.245 ; v1(152.781,55.245) 151.92,55.245 ; 153.78,78.318 153.805,78.343 156.024,78.343 ; 153.797,81.671 156.1,81.671 ; 155.219,57.173 155.068,57.022 155.068,51.247 155.068,49.778 156.489,48.357 ; 159.004,78.343 167.086,78.343 168.929,76.501 168.929,56.839 ; 159.496,82.321 160.73,83.555 ; 160.782,13.716 160.782,16.383 160.782,18.16 ; 160.782,18.795 160.782,19.477 160.782,20.366 ; 160.788,18.183 160.788,18.866 ; 163.322,19.039 166.125,19.039 ; 166.563,22.457 166.563,23.76 ; 168.807,82.574 169.164,82.931 169.164,83.421 170.18,84.437 170.18,84.842 ; v1@36.043,40.259 36.046,40.256 41.783,40.256 ; 61.938,66.731 62.686,66.731 ; 61.938,66.731 62.038,66.831 62.038,67.379 ; 62.038,67.379 62.686,66.731 ; 73.837,78.756 73.837,81.632 ; 73.837,78.756 76.962,78.756 78.421,80.215 ; 73.837,81.632 77.472,81.632 ; 73.837,81.632 73.837,82.895 73.862,82.921 76.184,82.921 77.472,81.632 ; 77.472,81.632 78.655,80.45 78.421,80.215 ; 83.61,73.454 85.48,73.454 85.645,73.619 ; 85.487,76.447 85.5,76.433 85.525,76.433 ; 85.487,76.447 85.512,76.447 85.525,76.433 ; 85.525,76.433 85.577,76.382 85.577,76.357 85.469,76.249 85.469,74.007 85.645,73.831 ; 85.645,73.619 85.645,73.831 ; 168.929,56.839 169.436,56.331 cw(c167.64,54.535) 170.18,54.535 170.18,53.842 168.929,55.093 168.929,56.839
  Top Layer w1: 9.847,64.262 9.847,67.938 9.854,67.945 ; 12.319,42.978 12.389,42.978 12.514,43.103 12.514,45.593 ; 13.081,64.262 17.653,64.262 ; 15.494,45.593 16.891,44.196 16.891,38.1 19.243,35.748 19.243,32.809 19.304,32.87 ; 16.054,67.945 16.054,70.495 ; 20.955,70.993 20.574,70.612 20.574,66.421 15.875,61.722 15.875,55.499 17.526,53.848 22.225,53.848 ; 21.793,32.809 21.793,32.941 21.978,33.126 22.86,33.126 24.359,33.126 ; 22.225,57.748 22.578,58.101 22.578,59.662 23.222,60.306 23.222,60.641 23.287,60.706 23.876,60.706 30.861,60.706 33.792,63.637 33.792,72.009 ; 22.331,37.084 25.07,37.084 ; 23.546,33.71 23.546,36.957 ; 23.622,63.686 23.632,63.686 23.697,63.751 23.697,66.802 ; 24.359,30.146 33.528,30.146 ; 28.625,55.698 38.735,55.698 ; 28.692,72.009 28.692,68.598 29.278,68.012 29.772,68.012 29.897,67.887 29.897,67.393 ; 29.327,67.963 29.897,67.393 ; 29.897,66.802 29.897,67.393 ; 29.913,67.377 29.897,67.393 ; 31.242,32.809 31.242,34.29 29.718,35.814 29.718,41.148 31.304,42.734 ; 31.242,45.779 31.301,45.779 31.366,45.844 31.874,45.844 34.04,48.01 35.331,48.01 ; 33.274,36.733 33.282,36.724 36.043,36.724 36.257,36.724 36.322,36.659 36.322,33.126 33.977,33.126 33.792,32.941 33.792,32.809 ; 33.476,30.094 33.528,30.146 ; 39.243,57.472 39.148,57.472 39.083,57.407 39.083,56.046 38.735,55.698 ; 39.243,60.452 39.243,62.434 39.368,62.559 39.37,62.559 ; 40.58,68.884 40.455,68.759 39.37,68.759 39.37,70.673 40.11,71.413 40.391,71.413 40.622,71.644 40.622,72.009 ; 41.91,53.721 41.91,48.26 42.227,47.942 ; 45.722,72.009 45.722,59.311 42.109,55.698 38.735,55.698 ; 47.364,18.686 49.75,18.686 51.528,16.908 53.845,16.908 53.92,16.833 53.805,16.833 ; 47.491,7.656 47.491,11.282 ; 47.491,14.605 47.491,12.576 ; 48.768,30.146 36.322,30.146 33.528,30.146 ; 53.92,11.833 53.824,11.929 ; 54.419,4.313 54.419,4.567 54.419,7.831 54.419,10.018 ; 63.542,14.721 63.659,14.838 ; 64.232,14.721 68.492,14.721 68.608,14.838 ; 71.138,52.959 71.138,53.242 ; 71.138,55.753 71.138,53.242 ; 71.687,6.604 73.724,6.604 ; 73.608,14.838 73.608,25.662 82.561,34.615 82.561,50.32 79.585,53.297 75.195,53.297 75.184,53.307 71.203,53.307 71.138,53.242 ; 74.735,1.905 76.903,1.905 ; 76.703,6.604 78.105,6.604 ; 78.142,13.998 78.207,14.063 78.263,14.063 ; v4@78.514,23.55 78.514,22.101 78.542,22.073 ; 79.883,1.905 82.042,1.905 ; 81.339,6.604 81.339,10.63 81.078,10.891 81.078,11.226 81.091,11.239 v4(82.95,11.239) ; 81.72,6.604 88.822,6.604 ; 85.022,1.905 99.441,1.905 101.219,3.683 101.219,20.955 98.778,23.396 95.25,23.396 ; 88.9,6.604 95.25,12.954 95.25,13.396 ; 126.746,26.543 126.553,26.35 126.553,26.015 126.553,25.114 126.277,24.838 126.277,21.671 127.16,20.789 127.672,20.789 127.737,20.724 ; 131.978,23.772 132.92,23.772 133.045,23.897 133.045,26.919 133.045,30.652 133.045,32.029 ; 137.033,47.879 137.033,54.124 ; 138.684,25.728 v1@138.684,30.988 ; 138.811,24.186 138.977,24.186 139.042,24.251 139.042,25.96 ; 141.58,24.17 141.915,24.17 141.98,24.235 141.98,25.948 ; 150.114,26.797 150.114,19.876 151.106,18.884 151.776,18.884 ; 150.419,27.304 150.926,26.797 ; 151.054,32.029 151.054,35.56 ; 151.841,18.819 160.123,18.819 ; 152.146,38.226 152.146,38.735 156.489,43.078 156.489,47.879 ; 155.219,60.153 155.237,60.17 158.801,60.17 ; 156.489,25.78 156.515,25.805 156.515,27.754 156.515,32.029 ; 158.801,53.97 159.886,53.97 161.95,51.905 161.95,47.879 ; 160.401,92.409 160.575,92.583 161.29,92.583 167.286,86.587 168.893,86.587 170.18,85.301 ; 161.133,22.662 161.147,22.676 161.944,22.676 163.572,22.676 ; 161.976,29.61 161.976,32.029 ; 163.322,22.019 163.507,22.019 163.572,22.084 163.572,22.676 ; 163.572,24.204 163.572,22.676 ; 170.18,53.842 170.18,44.958 167.135,41.913 167.135,40.389 166.37,39.624 167.055,38.939 167.055,36.653 171.45,32.258 172.262,32.258 ; 170.18,84.842 170.18,85.301 ; 176.149,39.878 176.149,40.94 177.8,42.591 177.8,63 177.8,64.3 177.8,85.09 176.116,86.774 170.721,86.774 170.18,86.233 170.18,85.301 ; 16.054,70.495 cw(c18.141,70.495) 16.199,71.259 ; 16.054,70.495 16.054,71.155 16.158,71.259 16.199,71.259 ; 16.199,71.259 cw(c18.141,70.495) 16.665,71.971 16.703,72.009 16.703,71.644 16.318,71.259 16.199,71.259 ; 47.491,11.282 47.491,11.929 ; 47.491,11.282 48.138,11.929 ; 47.491,11.929 48.138,11.929 ; 47.491,11.929 47.491,12.576 ; 47.491,12.576 48.138,11.929 ; 48.138,11.929 52.508,11.929 ; 52.508,11.929 53.824,11.929 ; 52.508,11.929 54.419,10.018 ; 53.824,11.929 53.939,11.929 54.419,11.449 54.419,10.018 ; 139.042,25.96 139.065,25.984 139.065,26.109 139.042,26.085 139.042,25.96
  Top Layer w1.1: 69.878,88.04 70.857,87.061 70.857,77.51 70.842,75.721 ; 70.857,75.589 72.436,74.01 76.093,74.01
  Top Layer w1.5: 85.521,69.423 91.771,69.423 ; 89.041,73.831 91.047,73.831 ; 93.506,72.291 93.506,71.159 91.771,69.423 ; 93.506,72.427 93.506,73.993 ; 93.523,71.159 93.523,67.553 92.622,67.553 92.368,67.806 92.368,68.708 91.771,69.306 91.771,69.423 ; 94.425,67.553 94.678,67.806 ; 169.725,29.369 170.718,31.033 170.945,31.412 170.979,31.469 171.45,32.258 ; 175.461,21.177 179.379,25.118 ; 176.149,39.878 176.955,38.238 176.976,38.196 177.532,37.065 178.507,35.08
  Top Layer w2: 170.18,84.437 170.18,84.113 170.642,83.651 171.371,83.651 177.053,77.969
  Bottom Layer w0.3: v1(2.413,19.406) v1@2.506,19.406 ; v1@8.185,22.676 8.16,22.65 8.128,22.65 1.568,29.21 1.568,72.306 7.544,78.283 8.473,78.283 63.053,78.283 63.632,78.283 70.676,85.327 v2(72.819,85.327) ; v1(8.28,24.478) 2.318,30.44 2.318,71.996 7.584,77.262 63.672,77.262 65.907,79.497 66.2,79.497 ; v1@66.336,78.271 66.359,78.294 68.211,78.294 68.234,78.271 98.305,78.271 v2(99.833,79.798) ; v1@67.558,77.192 67.887,77.521 99.658,77.521 v2(100.387,78.25) ; v2@80.608,89.559 80.608,89.516 80.312,89.22 80.312,83.364 81.803,81.873 109.852,81.873 v2(109.852,82.085) ; v2@81.617,91.34 81.617,88.797 81.062,88.242 81.062,84.222 82.476,82.808 v2(110.674,82.808) ; v2@81.713,93.363 82.862,92.214 82.862,85.595 83.715,84.742 v2(110.969,84.742) ; v2@81.959,87.529 81.959,84.385 82.658,83.687 v2(110.234,83.687) ; v2@83.965,86.592 116.002,86.592 v2@116.663,87.253 ; v2@85.364,88.854 85.555,88.663 v2(100.777,88.663) ; v2@87.015,104.599 v2(96.931,104.599) ; 88.941,95.25 89.916,95.25 ; v2(95.933,101.699) 95.967,101.665 v2(100.165,101.665) ; v2@97.605,90.95 v2(102.879,90.95) ; v2@97.86,87.75 97.882,87.691 115.185,87.691 v2@115.604,88.11 ; v2(98.857,89.742) 98.975,89.624 101.466,89.624 ; v2(104.476,90.707) 107.318,90.707 v2@107.651,91.04 ; v2(106.129,88.919) 114.239,88.919 v2(114.268,88.889) ; v2(108.288,85.723) 109.831,85.723 v2@109.866,85.758 ; 108.488,101.465 109.761,102.737 109.761,104.167 109.746,104.182 ; v2(113.756,95.302) v2@113.756,95.356 ; v2@117.548,90.951 117.566,90.933 v2(120.884,90.933) ; 119.98,104.186 120.215,104.186